# Altium PCB RdriveC1.PcbDoc (part 1 of 2)
Units mm, origin at the board's own origin, x right, y up, seen from the top; angles counter-clockwise.
Board outline 52.05 x 52.02 mm, 4 copper layers (Top Layer, S1, GND, Bottom Layer), stack 0.848 mm thick; 109 components, 86 nets, 393 pads, 206 vias.
Unrouted connection lines stored in the file: 2.
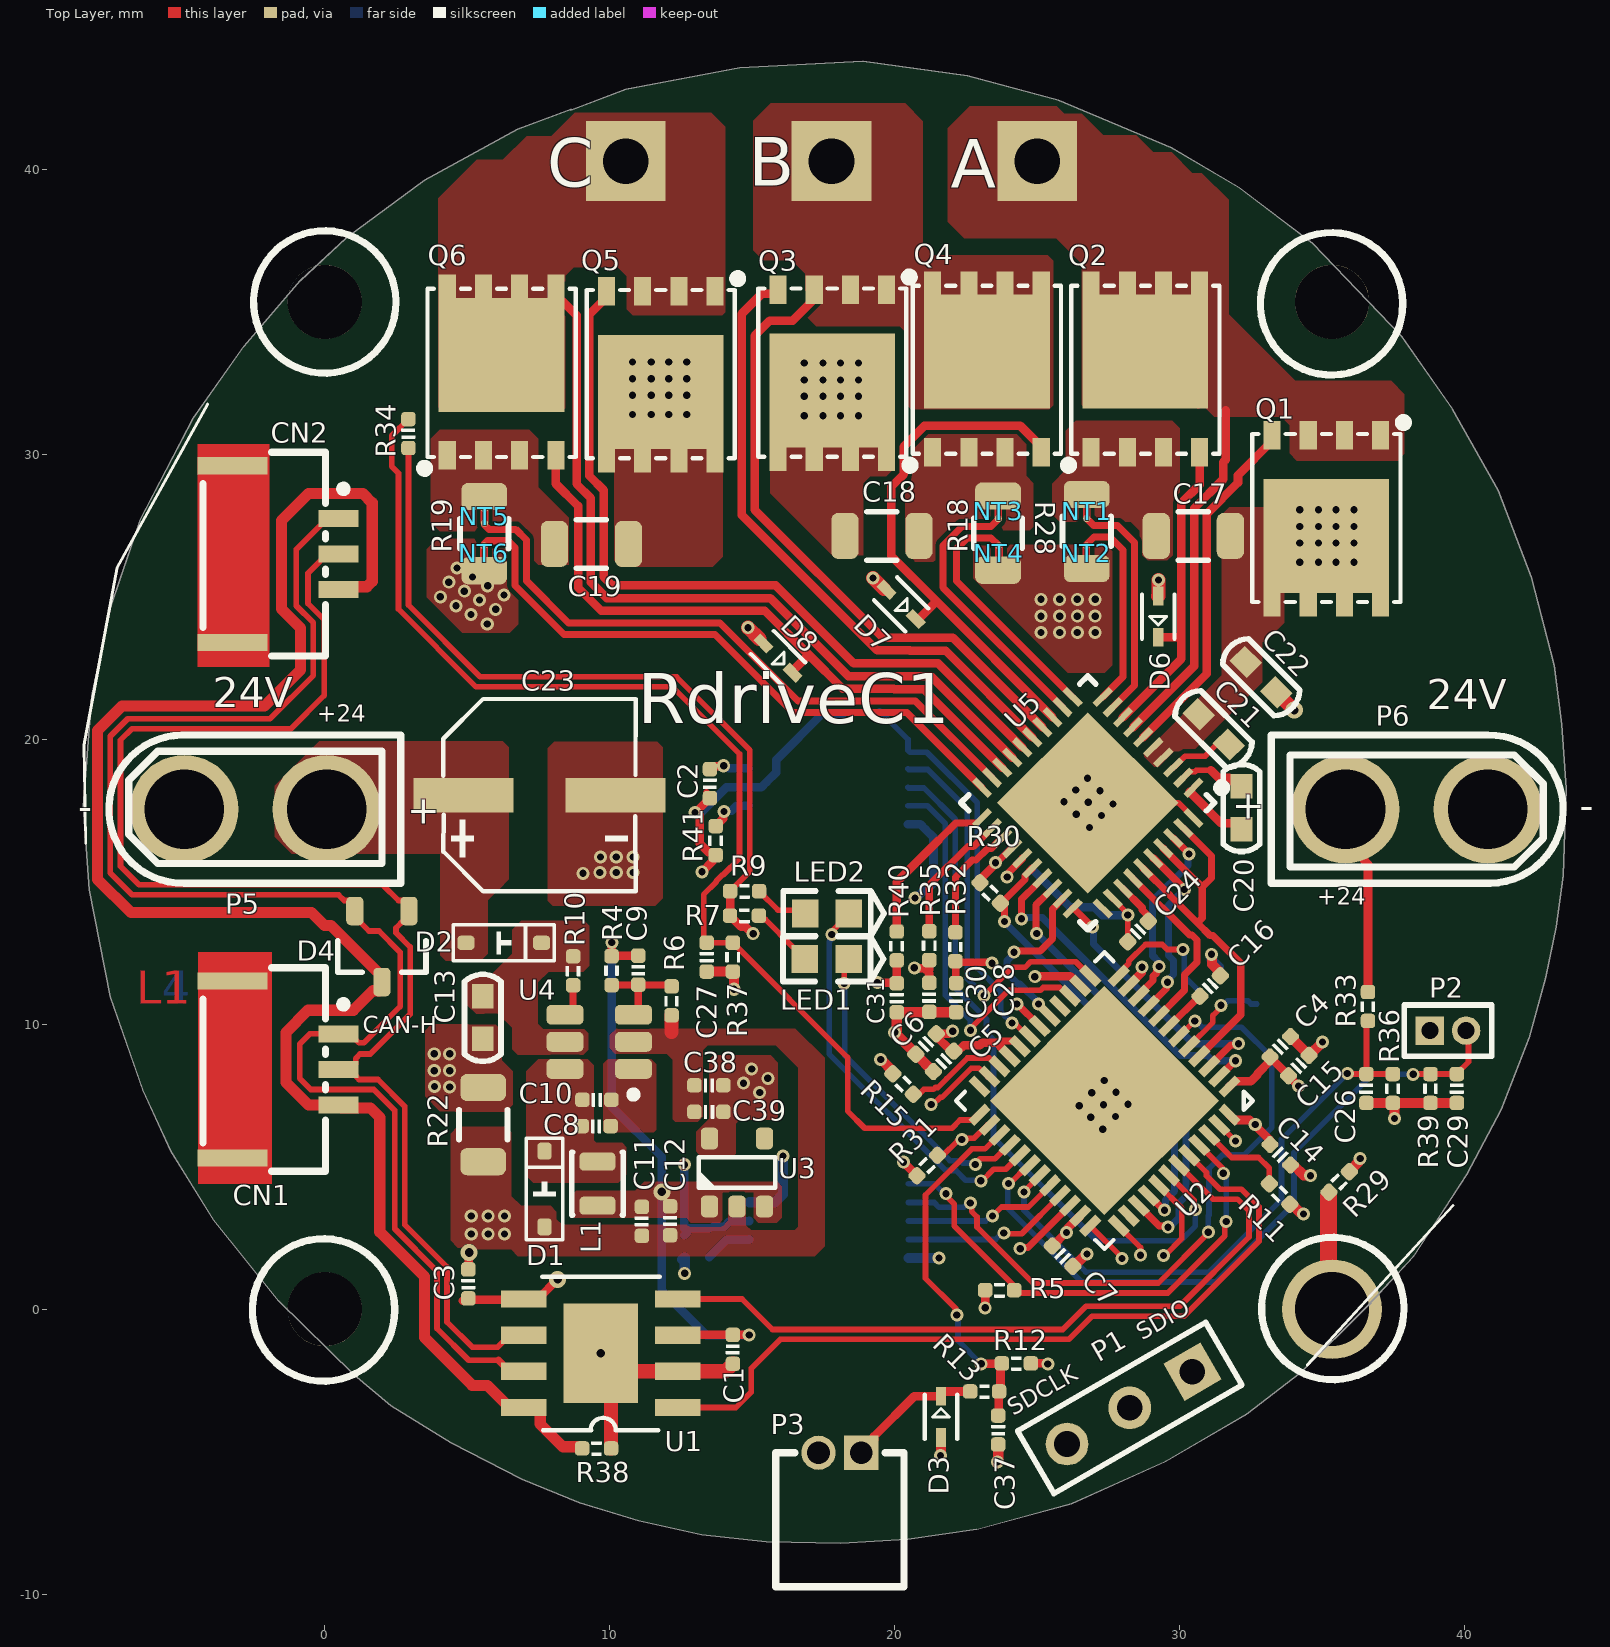
[diagram p0: Top Layer view]
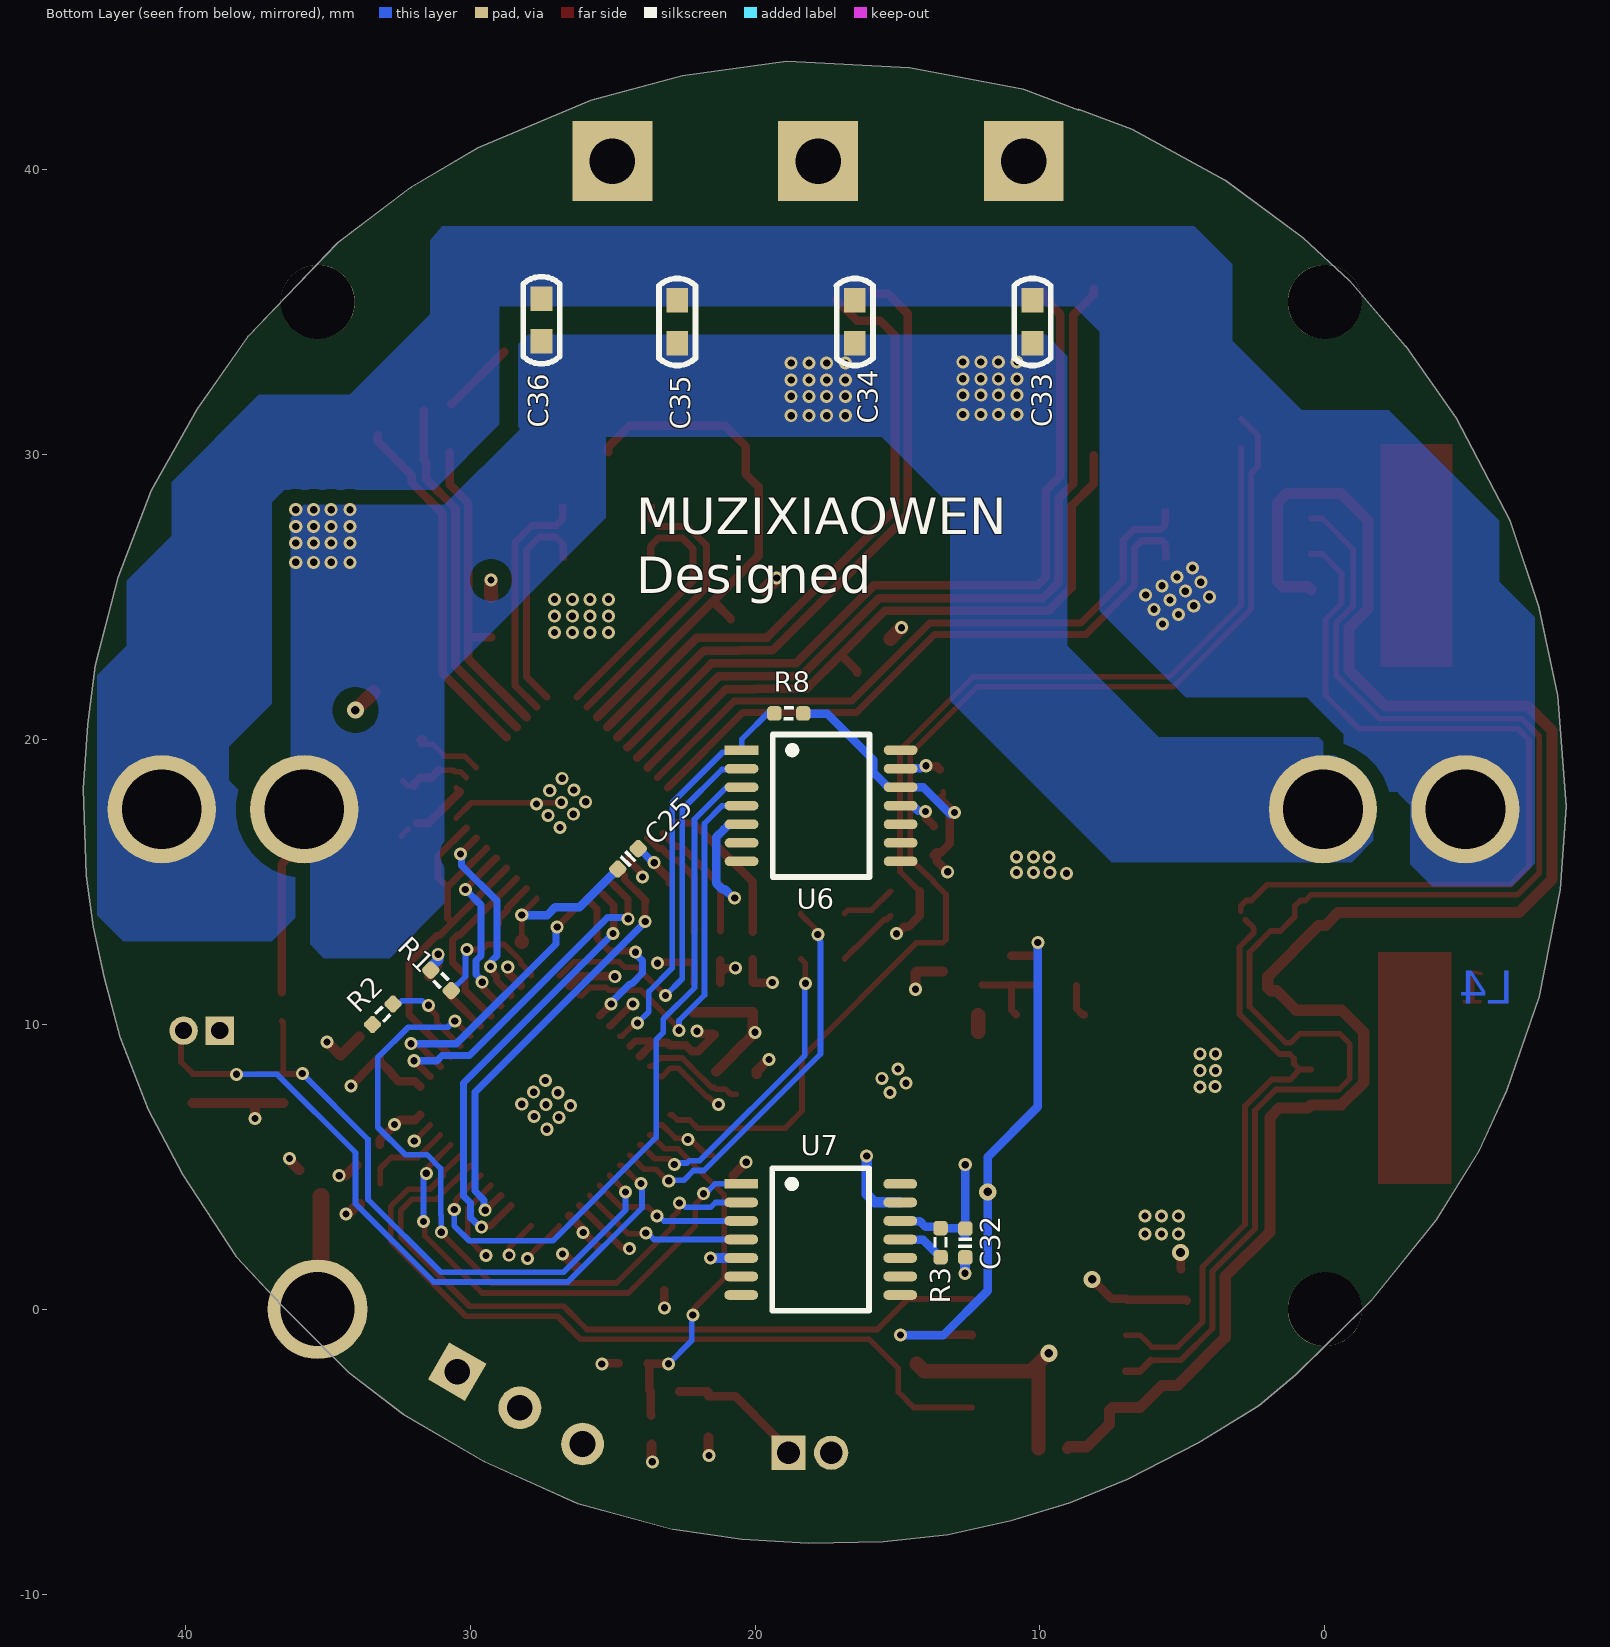
[diagram p1: Bottom Layer view, seen from below]
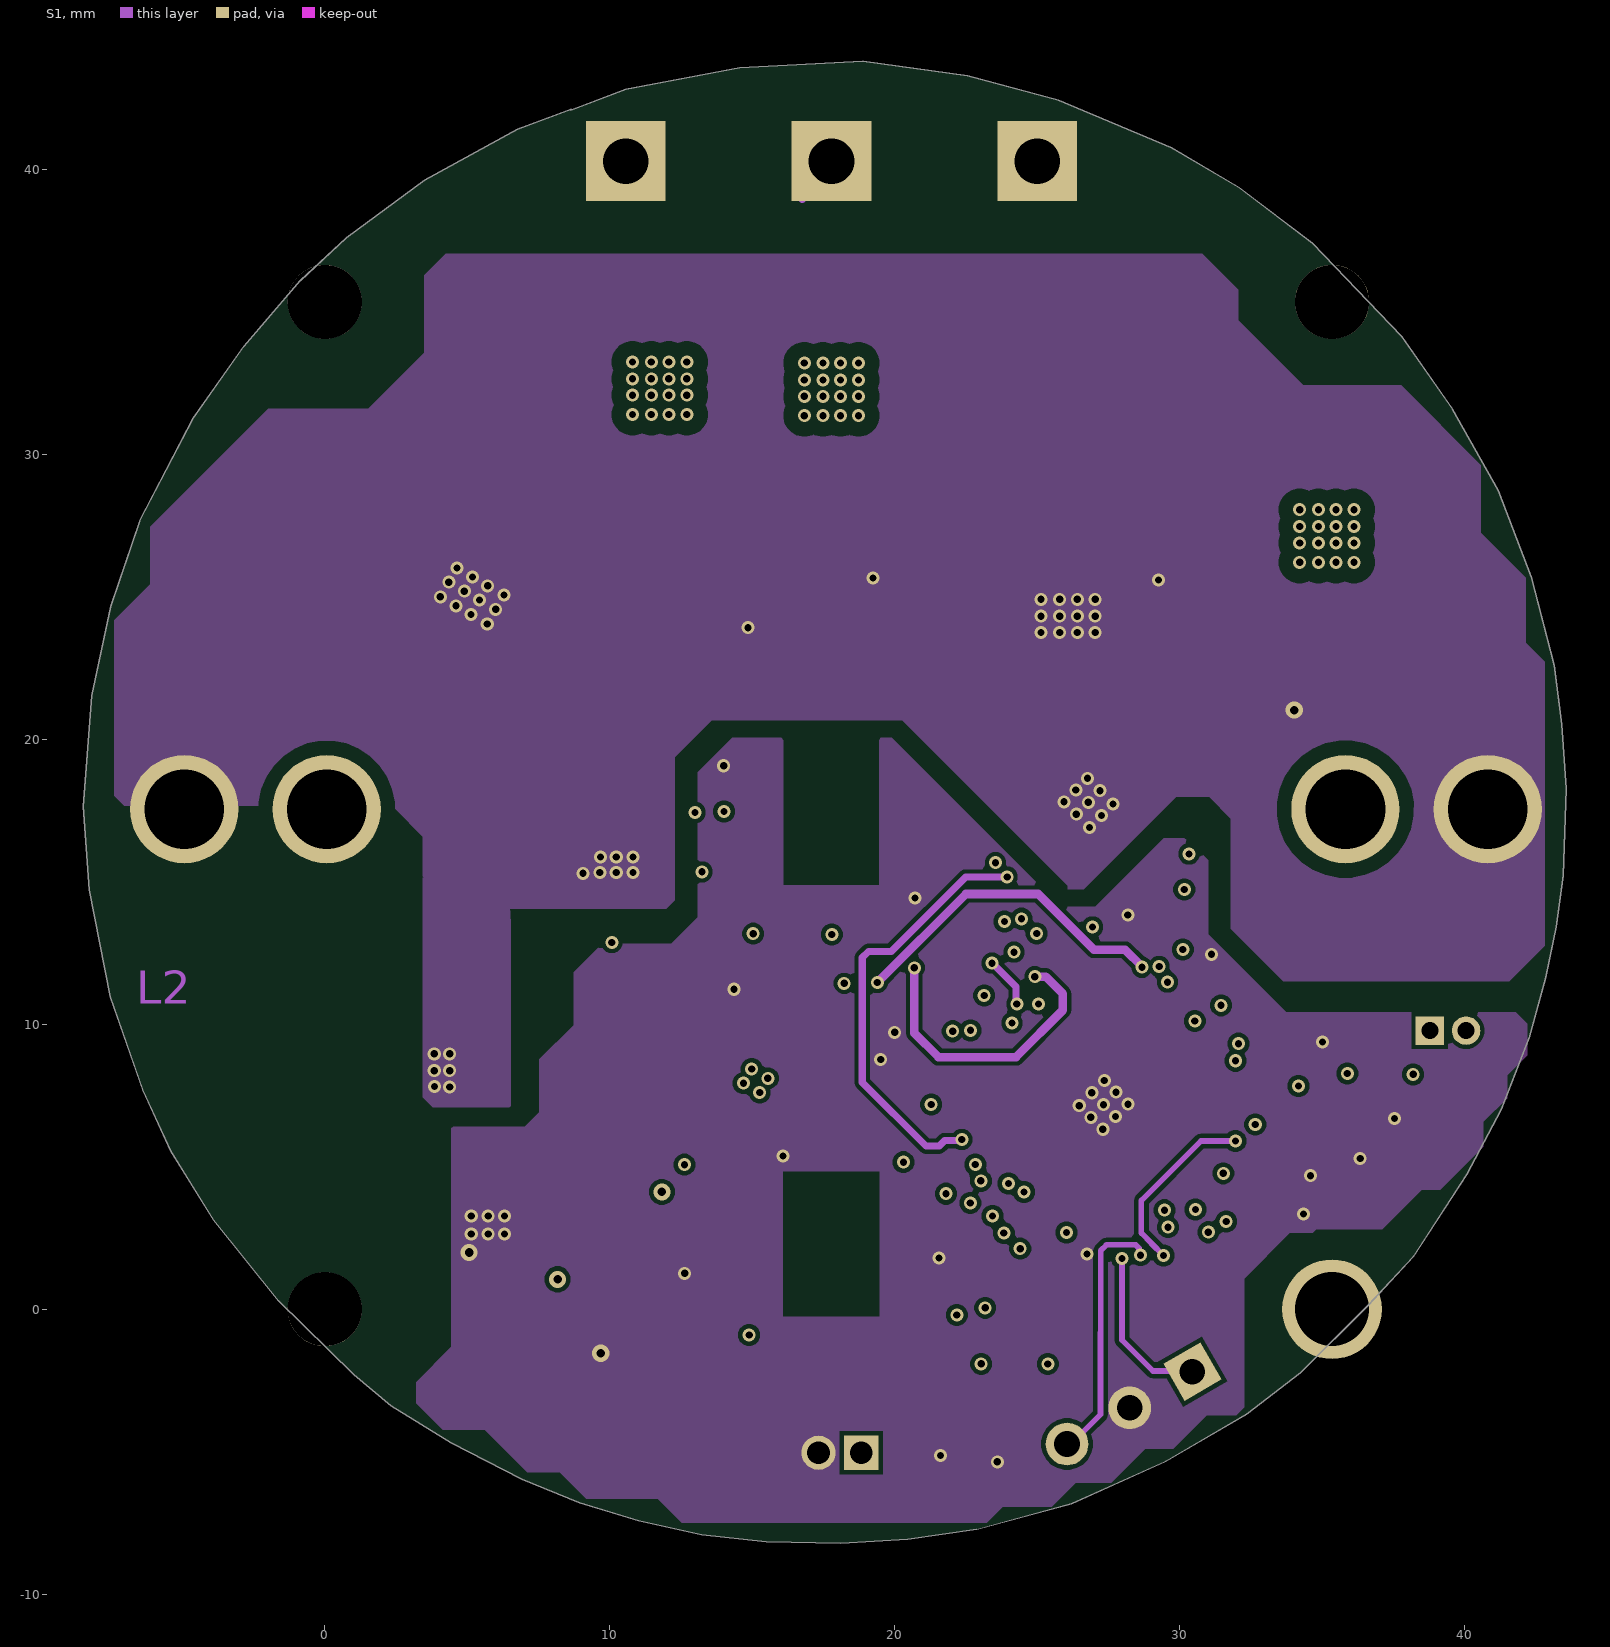
[diagram p2: S1]
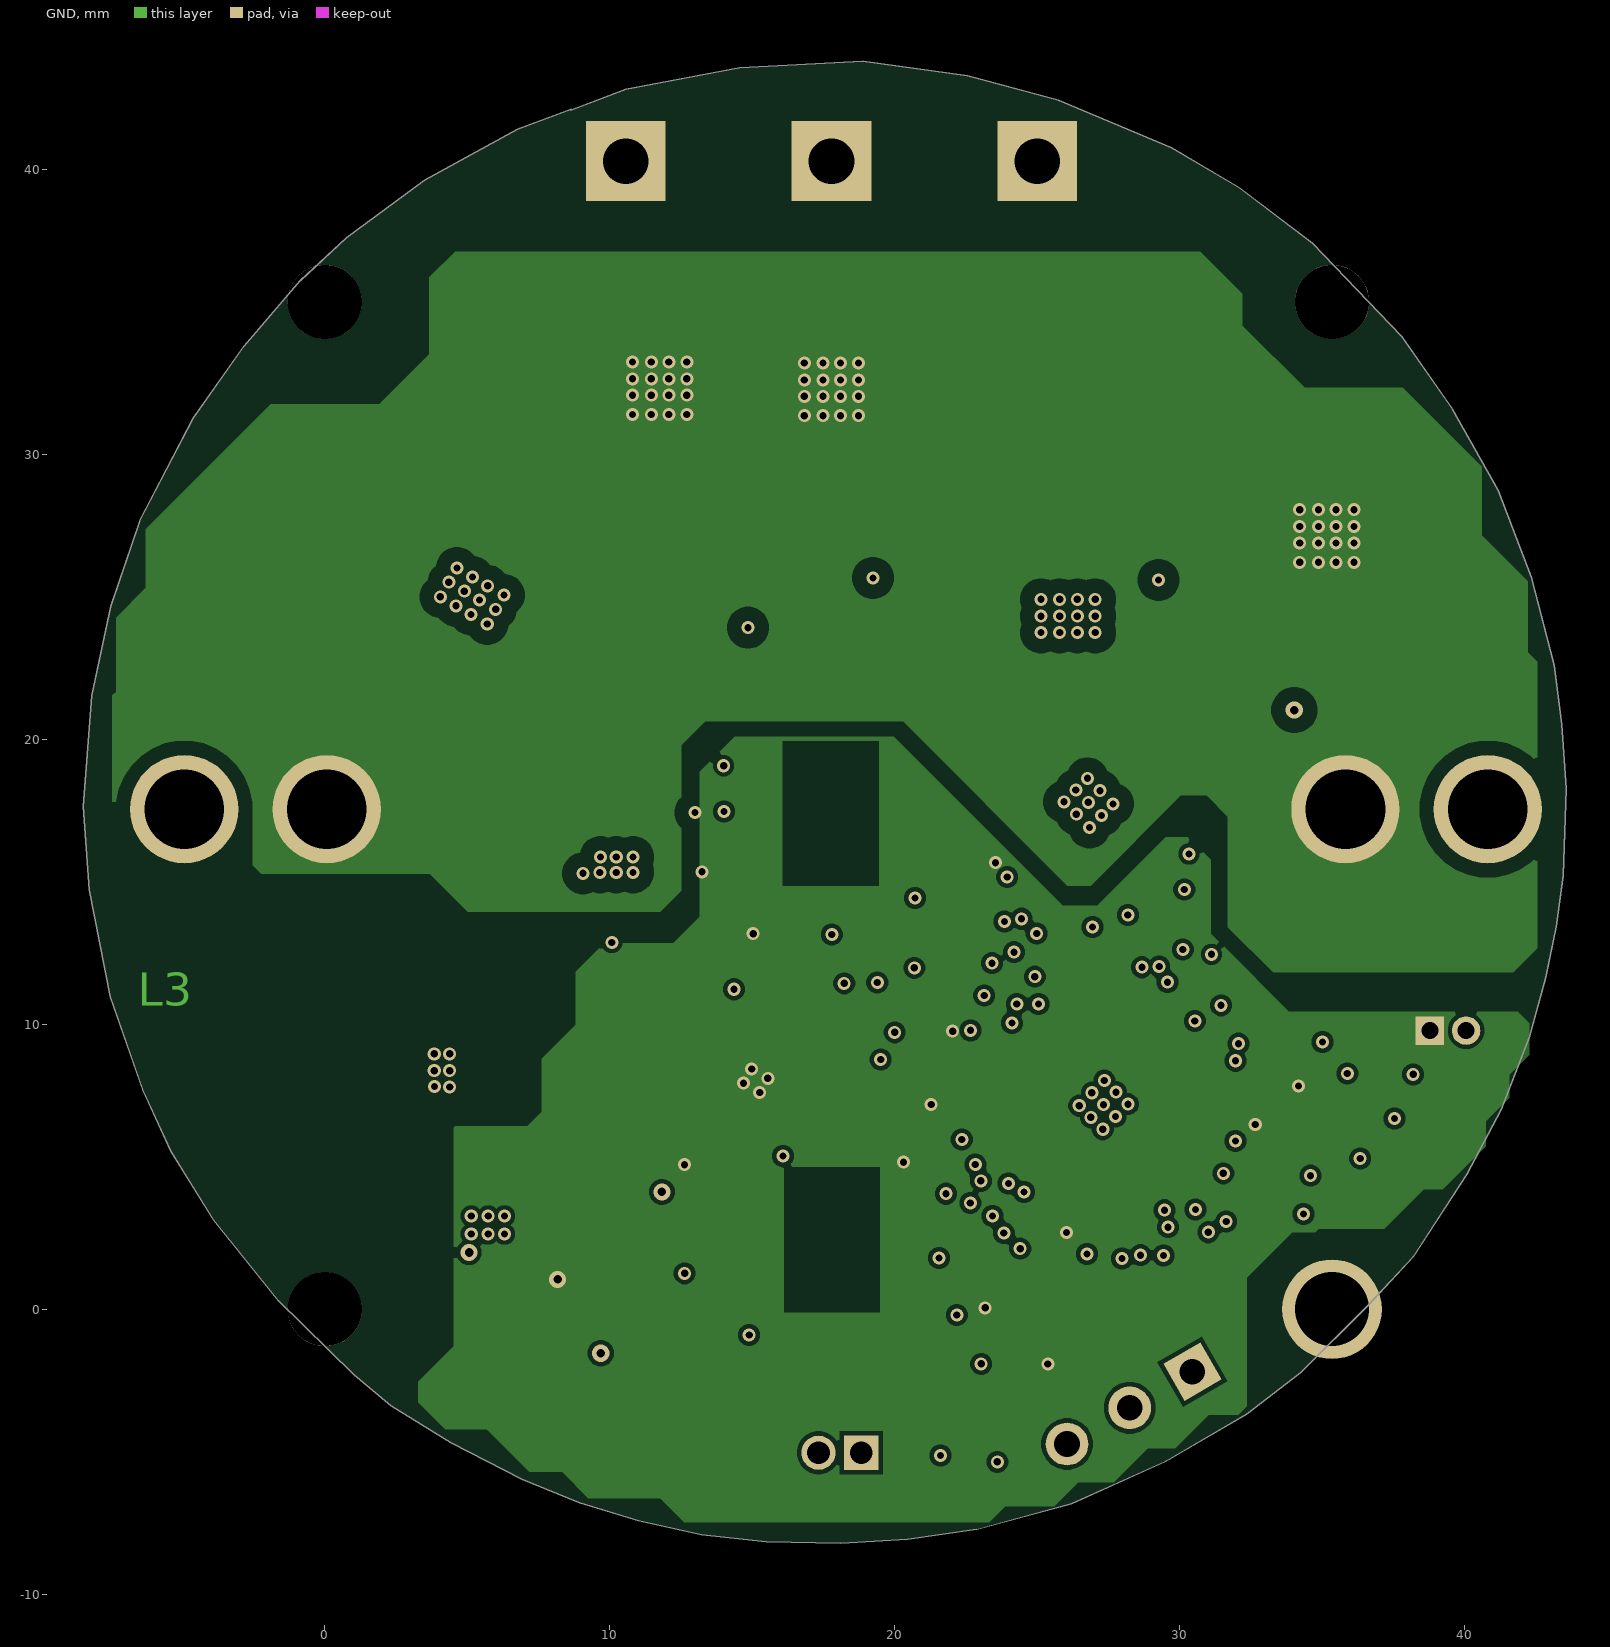
[diagram p3: GND]
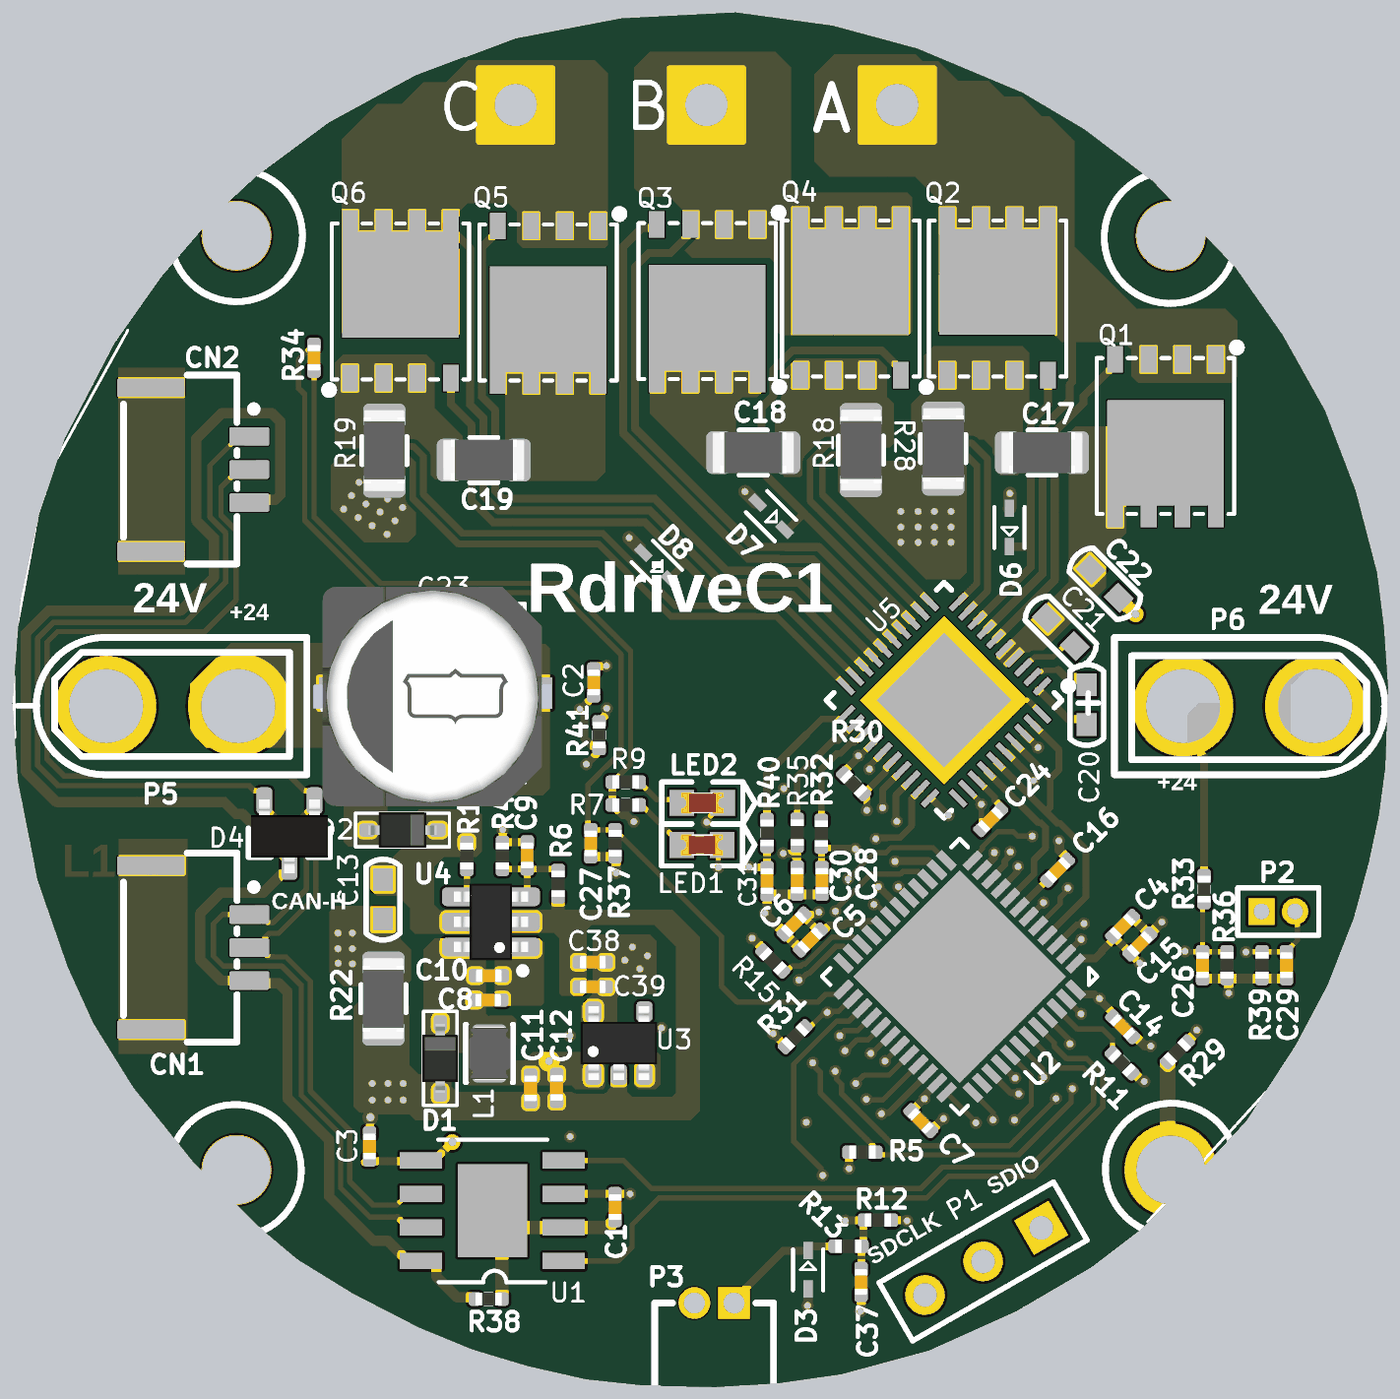
[diagram p5: 3D render of the assembled board from above, using the file's embedded part models]
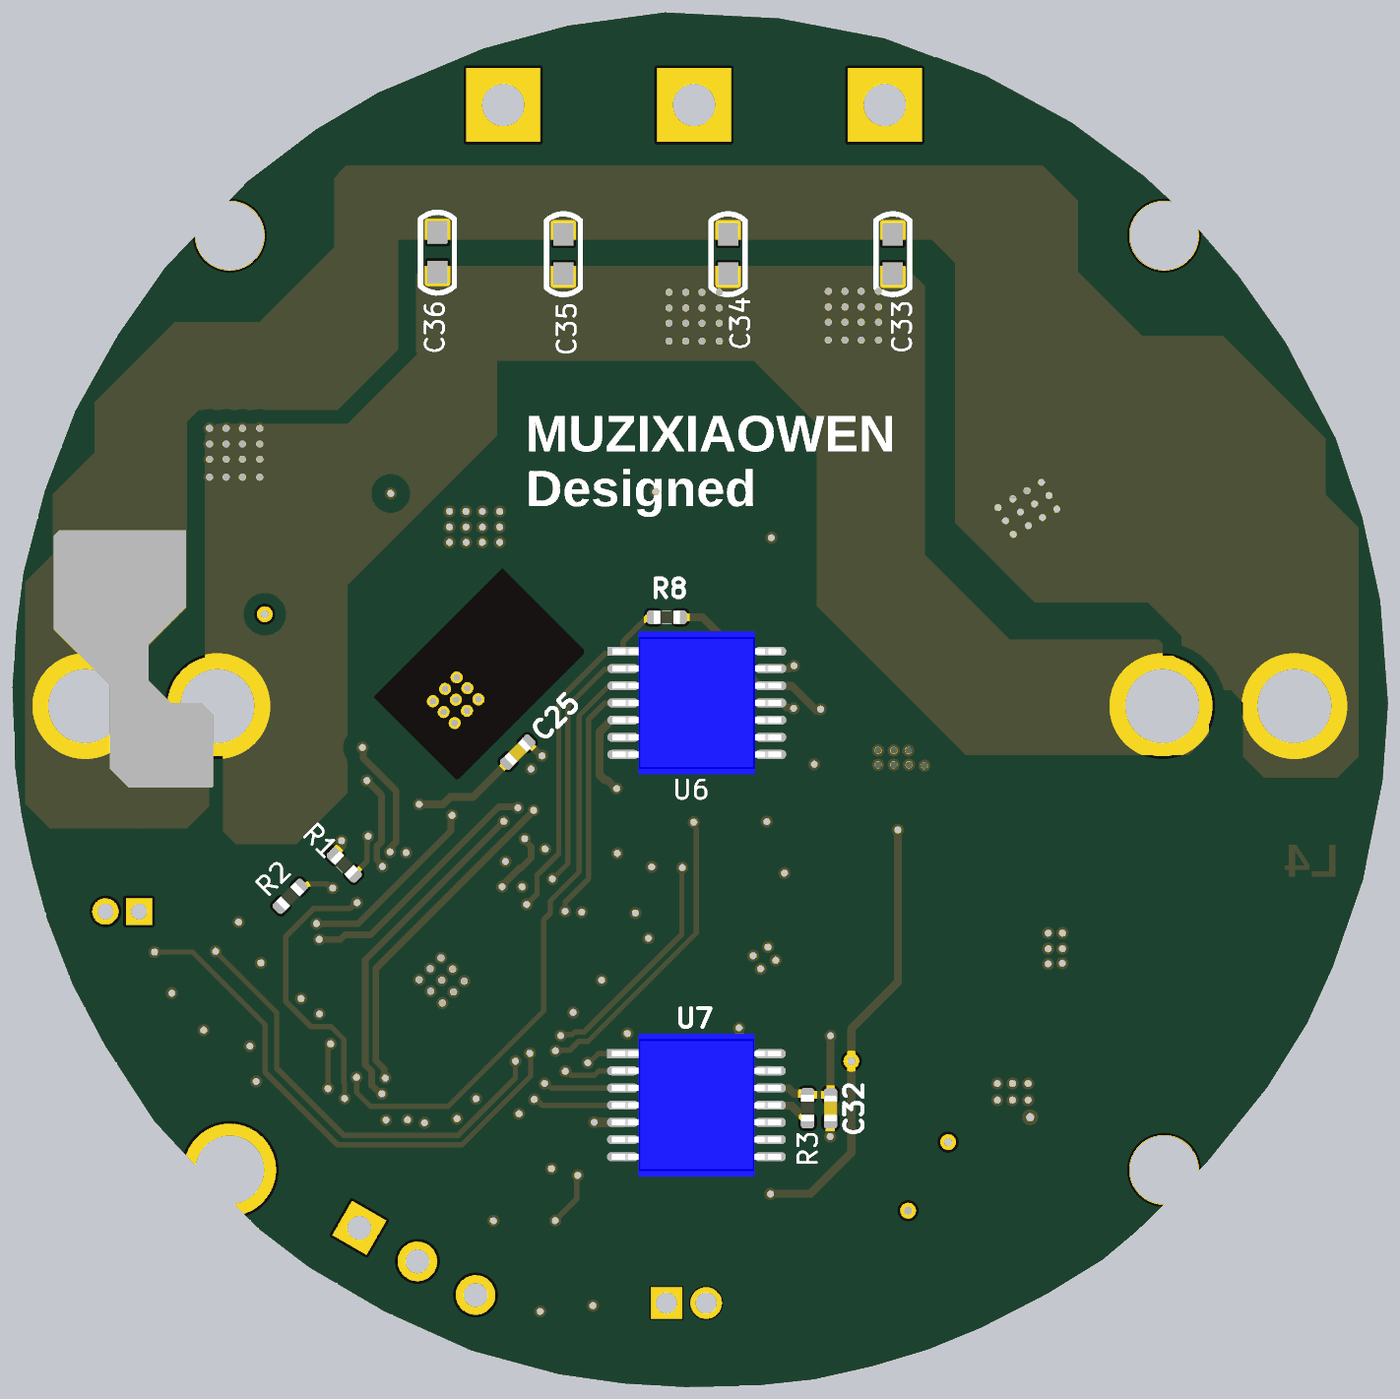
[diagram p6: 3D render of the assembled board from below, using the file's embedded part models]

## Layer stack, top to bottom
Top Solder: solder mask 0.0102, Solder Resist, Dk 3.5
Top Layer: signal copper 0.0356
Dielectric 1: core 0.254, FR-4, Dk 4.2
Dielectric 3: core 0.127, FR-4, Dk 4.2
S1: signal copper 0.036
Dielectric 4: prepreg 0.0711, PP-006, Dk 4.1
GND: signal copper 0.035
Dielectric 2: core 0.254, Dk 4.2
Bottom Layer: signal copper 0.0356
Bottom Solder: solder mask 0.0102, Solder Resist, Dk 3.5

## Board outline
8.635,42.088 10.572,42.814 14.568,43.575 18.893,43.8 22.56,43.298 25.76,42.434 29.722,40.773 32.092,39.372 34.669,37.417 37.8,34.148 39.582,31.605 41.19,28.733 42.349,25.706 43.163,22.592 43.422,20.534 43.578,18.268 43.474,15.223 43.232,13.424 42.851,11.642 42.28,9.532 41.294,7.006 40.083,4.723 38.215,1.851 36.606,0.122 34.254,-2.231 32.351,-3.684 29.514,-5.345 26.21,-6.832 22.889,-7.732 20.467,-8.078 18.114,-8.216 15.502,-8.164 13.236,-7.922 11.022,-7.42 8.946,-6.798 6.922,-5.967 4.431,-4.687 2.321,-3.39 1.024,-2.3 -1.623,0.295 -3.906,3.132 -5.411,5.553 -6.38,7.681 -7.522,10.968 -8.266,14.721 -8.473,17.645 -8.179,21.537 -7.504,24.668 -6.501,27.661 -4.616,31.276 -2.834,33.802 -0.862,36.102 0.764,37.607 3.497,39.631 6.767,41.413 8.652,42.122

## Design rules (kind name [scope] priority, off if disabled: settings)
Clearance Clearance_2 [InNet('DCBUS')] p1 off: gap=0.5 ignorepadtopadclearanceinfootprint=FALSE
Clearance Clearance_1 [All] p2: gap=0.15 ignorepadtopadclearanceinfootprint=FALSE
Clearance [InNet('PGND')] p3 off: gap=0.5 ignorepadtopadclearanceinfootprint=FALSE
ComponentClearance [All] p1 off: gap=0 collisioncheckmode=3 verticalgap=0.254 showdistances=FALSE
DiffPairsRouting [All] p1: maxlimit=0.254 minlimit=0.254 mostfreqgap=0.254 toplayer_minwidth=0.381 toplayer_maxwidth=0.381 toplayer_prefwidth=0.381 midlayer1_minwidth=0.381 midlayer1_maxwidth=0.381 midlayer1_prefwidth=0.381 midlayer2_minwidth=0.381 midlayer2_maxwidth=0.381 midlayer2_prefwidth=0.381 bottomlayer_minwidth=0.381 bottomlayer_maxwidth=0.381 bottomlayer_prefwidth=0.381 substack1={5B69FCFA-7DF9-414E-A3D1-88AEDCC3E603} toplayer_{5b69fcfa-7df9-414e-a3d1-88aedcc3e603}_minwidth=0.381 toplayer_{5b69fcfa-7df9-414e-a3d1-88aedcc3e603}_maxwidth=0.381 toplayer_{5b69fcfa-7df9-414e-a3d1-88aedcc3e603}_prefwidth=0.381 midlayer1_{5b69fcfa-7df9-414e-a3d1-88aedcc3e603}_minwidth=0.381 midlayer1_{5b69fcfa-7df9-414e-a3d1-88aedcc3e603}_maxwidth=0.381 midlayer1_{5b69fcfa-7df9-414e-a3d1-88aedcc3e603}_prefwidth=0.381 midlayer2_{5b69fcfa-7df9-414e-a3d1-88aedcc3e603}_minwidth=0.381 midlayer2_{5b69fcfa-7df9-414e-a3d1-88aedcc3e603}_maxwidth=0.381 midlayer2_{5b69fcfa-7df9-414e-a3d1-88aedcc3e603}_prefwidth=0.381 bottomlayer_{5b69fcfa-7df9-414e-a3d1-88aedcc3e603}_minwidth=0.381 bottomlayer_{5b69fcfa-7df9-414e-a3d1-88aedcc3e603}_maxwidth=0.381 bottomlayer_{5b69fcfa-7df9-414e-a3d1-88aedcc3e603}_prefwidth=0.381 maxuncoupledlength=12.7
HoleSize [All] p1: absolutevalues=TRUE maxlimit=9.54 minlimit=0.025 maxpercent=80.000 minpercent=20.000
HoleToHoleClearance [All] p1 off: gap=0.254 allowstackedmicrovias=TRUE
MinimumSolderMaskSliver [All] p1 off: minsoldermaskwidth=0.254
PasteMaskExpansion [All] p1 off: expansion=0
PlaneClearance [All] p1: clearance=0.3
PlaneConnect [All] p1: planeconnectstyle=Direct reliefexpansion=0.208 reliefentries=4 reliefconductorwidth=0.454 reliefairgap=0.254
PolygonConnect [All] p1: connectstyle=Direct reliefconductorwidth=0.454 reliefentries=4 polygonreliefangle="90 Angle" airgapwidth=0.254
RoomDefinition RdriveC1 [InComponentClass('RdriveC1')] p1 off: confinementstyle=ConfineIn formatcopy=TRUE lockcomponents=FALSE outline -127.016,-93.71 -76.216,-93.71 -76.216,-68.31 -127.016,-68.31
RoutingCorners [All] p1 off: cornerstyle=45-Degree minsetback=2.54 maxsetback=2.54
RoutingLayers [All] p1: top layer_v5=TRUE mid layer 1_v5=TRUE mid layer 2_v5=FALSE bottom layer_v5=TRUE
RoutingVias [All] p1: holewidth=2.711 width=0.6 viastyle="Through Hole" minholewidth=0.1 minwidth=0.3 maxholewidth=2.711 maxwidth=6.27
SilkToBoardRegionClearance [All] p1 off:
SilkToSilkClearance [All] p1 off: silktosilkclearance=0.254
SilkToSolderMaskClearance [IsPad] p1 off: minsilkscreentomaskgap=0.254 clearancetoexposedcopper=TRUE
SolderMaskExpansion [All] p1 off: expansion=0.102 istentingtop=FALSE
Width [All] p1: maxlimit=8.254 minlimit=0.1 preferedwidth=0.254 substack1={5B69FCFA-7DF9-414E-A3D1-88AEDCC3E603}
17 further rules are at their usual default settings.

## Components (designator, comment, footprint, x,y, rotation, side; value= is the part's Value field where it differs from the comment)
A "M" motor 25.007,40.243 r0 top
B "M" motor 17.788,40.243 r0 top
C "M" motor 10.568,40.243 r0 top
C1 "0.1uF" CAP_0402 14.327,-1.407 r270 top value=0.1u
C2 "0.1uF" CAP_0402 13.521,18.448 r90 top
C3 "0.1uF" CAP_0402 5.038,0.887 r90 top value=0.1u
C4 "10uF" CAP_0402 33.538,9.213 r225 top value=0.1u
C5 "0.1uF" CAP_0402 21.724,8.701 r225 top
C6 "1uF" CAP_0402 21.105,9.308 r225 top
C7 "0.1uF" CAP_0402 25.899,1.862 r135 top
C8 "0.1uF" CAP_0402 9.529,6.429 r0 top value=0.1u
C9 "100pF" CAP_0402 11.005,11.901 r270 top
C10 "0.1uF" CAP_0402 9.552,7.352 r0 top value=0.1u
C11 "0.1uF" CAP_0402 11.132,3.086 r90 top value=0.1u
C12 "10uF" CAP_0402 12.12,3.104 r90 top value=0.1u
C13 "10uF/35V" C0603 5.542,10.219 r270 top value="22uF 35V"
C14 "0.1uF" CAP_0402 33.539,5.421 r315 top
C15 "0.1uF" CAP_0402 34.188,8.552 r45 top
C16 "0.1uF" CAP_0402 31.078,11.347 r225 top value=0.1u
C17 "0.1uF/100V" 1206-RES 30.486,27.144 r180 top
C18 "0.1uF/100V" 1206-RES 19.558,27.144 r0 top
C19 "0.1uF/100V" 1206-RES 9.361,26.861 r180 top locked
C20 "47nF/100V" C0603 32.173,17.587 r270 top
C21 "1uF/25V" C0603 31.193,20.368 r135 top
C22 "0.1uF/100V" C0603 32.871,22.171 r315 top
C23 "220uF" 3d-CAP-SMD_BD6.3-L6.6-W6.6-LS7.2-FD 7.539,18.043 r0 top value=220uF/36V
C24 "1uF" CAP_0402 28.547,13.259 r45 top
C25 "1uF" CAP_0402 24.461,15.808 r135 bottom
C26 "1uF" CAP_0402 36.563,7.747 r270 top
C27 "1uF" CAP_0402 13.408,12.358 r270 top
C28 "1000PF" CAP_0402 22.16,10.937 r90 top
C29 "1uF" CAP_0402 39.736,7.747 r270 top
C30 "1000PF" CAP_0402 21.22,10.947 r90 top
C31 "1000PF" CAP_0402 20.081,10.929 r90 top
C32 "0.1uF" CAP_0402 12.621,2.325 r270 bottom
C33 "10uF/35V" C0603-3d 10.27,34.644 r270 bottom value="22uF 35V"
C34 "10uF/35V" C0603-3d 16.503,34.644 r270 bottom value="22uF 35V"
C35 "10uF/35V" C0603-3d 22.736,34.644 r270 bottom value="22uF 35V"
C36 "10uF/35V" C0603-3d 27.502,34.704 r270 bottom value="22uF 35V"
C37 "0.1uF" CAP_0402 23.638,-4.24 r270 top
C38 "0.1uF" CAP_0402 13.483,7.861 r0 top value=0.1u
C39 "10uF" CAP_0402 13.483,6.927 r0 top value=0.1u
CN1 "WAFER-GH1.25-3PLT-W1-P" CONN-SMD_WAFER-GH1.25-3PLT-W1-P -1.375,8.414 r270 top locked
CN2 "WAFER-GH1.25-3PLT-W1-P" CONN-SMD_WAFER-GH1.25-3PLT-W1-P -1.375,26.505 r270 top locked
D1 "二极管-5819W" SOD-323 7.713,4.22 r90 top
D2 "二极管-5819W" SOD-323 6.284,12.862 r0 top
D3 "moteus_BAT41KFILM" moteus:SOD-523_STM 21.635,-3.781 r90 top value=ESD5Z3.3
D4 "NUP2105" SOT23-3 2.005,12.73 r270 top
D6 "moteus_BAT41KFILM" moteus:SOD-523_STM 29.255,24.31 r270 top value=BAT41KFILM
D7 "moteus_BAT41KFILM" moteus:SOD-523_STM 20.233,24.739 r315 top value=BAT41KFILM
D8 "moteus_BAT41KFILM" moteus:SOD-523_STM 15.909,22.854 r315 top value=BAT41KFILM
L1 "6.8uH" IND-201612 9.573,4.408 r270 top
LED1 "LED RED" LC-0603_LED_S3 17.618,12.294 r180 top
LED2 "LED GREEN" LC-0603_LED_S3 17.631,13.889 r180 top
NT1 "0.25mm" NetTie_0.25mm 26.745,27.755 r90 top net-tie
NT2 "0.25mm" NetTie_0.25mm 26.734,26.793 r270 top net-tie
NT3 "0.25mm" NetTie_0.25mm 23.64,27.755 r90 top net-tie
NT4 "0.25mm" NetTie_0.25mm 23.664,26.793 r270 top net-tie
NT5 "0.25mm" NetTie_0.25mm 5.606,27.591 r90 top net-tie
NT6 "0.25mm" NetTie_0.25mm 5.588,26.793 r270 top net-tie
P1 "Header 3" HDR1X3 30.455,-2.193 r210 top
P2 "MHDR1X2" MHDR1X2 38.791,9.779 r0 top
P3 "MHDR1X2" CONN-TH_2P-P1.50_HCTL_HC-ZH1.5-2AW 18.079,-5.038 r0 top
P5 "HC-MX3.0-2*1AW" CONN-TH_XT30UW-F.G.Y -2.433,17.552 r0 top
P6 "HC-MX3.0-2*1AW" CONN-TH_XT30UW-F.G.Y 38.324,17.551 r180 top
Q1 "SE3082G2" DFN-8_L5.9-W5.2-P1.27-LS6.2-BL 35.157,27.746 r180 top
Q2 "SE3082G2" DFN-8_L5.9-W5.2-P1.27-LS6.2-BL 28.806,32.998 r0 top
Q3 "SE3082G2" DFN-8_L5.9-W5.2-P1.27-LS6.2-BL 17.815,32.852 r180 top
Q4 "SE3082G2" DFN-8_L5.9-W5.2-P1.27-LS6.2-BL 23.244,32.998 r0 top
Q5 "SE3082G2" DFN-8_L5.9-W5.2-P1.27-LS6.2-BL 11.795,32.798 r180 top
Q6 "SE3082G2" DFN-8_L5.9-W5.2-P1.27-LS6.2-BL 6.206,32.891 r0 top
R1 "100K" RES_0402 31.025,11.541 r45 bottom
R2 "0" RES_0402 33.068,10.354 r135 bottom
R3 "0" RES_0402 13.49,2.335 r270 bottom
R4 "5.1K" RES_0402 10.069,11.883 r270 top
R5 "10K" RES_0402 23.69,0.668 r0 top value=22R
R6 "1K" RES_0402 12.175,10.825 r270 top
R7 "560" RES_0402 14.733,13.813 r0 top value=22R
R8 "10K" RES_0402 18.818,20.912 r0 bottom value=22R
R9 "560" RES_0402 14.736,14.673 r0 top value=22R
R10 "1M" RES_0402 8.718,11.876 r90 top
R11 "DNI" RES_0402 33.515,4.045 r315 top
R12 "10K" RES_0402 24.277,-1.903 r180 top value=22R
R13 "560" RES_0402 23.162,-2.888 r180 top value=22R
R15 "2K" RES_0402 20.3,7.904 r135 top
R18 "1mOhm" 1206-RES 23.635,27.239 r90 top locked
R19 "1mOhm" 1206-RES 5.597,27.222 r90 top locked
R22 "0" 1206-RES 5.561,6.48 r270 top
R28 "1mOhm" 1206-RES 26.745,27.298 r90 top
R29 "0" RES_0402 35.606,4.468 r225 top
R30 "2K" RES_0402 23.356,14.61 r135 top
R31 "2K" RES_0402 21.145,5.042 r225 top
R32 "22R" RES_0402 22.136,12.722 r90 top value=2.2R
R33 "100K" RES_0402 36.618,10.626 r90 top
R34 "47K" CAP_0402 2.936,30.736 r270 top
R35 "22R" RES_0402 21.22,12.761 r90 top value=2.2R
R36 "4.7k" RES_0402 37.489,7.747 r90 top
R37 "10K" RES_0402 14.323,12.358 r270 top
R38 "0" RES_0402 9.543,-4.888 r180 top
R39 "10K" RES_0402 38.812,7.747 r270 top
R40 "22R" RES_0402 20.078,12.75 r90 top value=2.2R
R41 "0" RES_0402 13.725,16.449 r90 top
U1 "TCAN1057AVDRBRQ1" SOIC8_2 9.679,-1.547 r180 top
U2 "moteus_STM32G474CEU6" moteus:UFQFPN-48_7X7X0P55MM 27.367,7.319 r45 top locked value=STM32G474CEU6
U3 "ME6211 3V3" SOT23-5-3d 14.471,4.799 r90 top
U4 "ME3116" SOT23-6 9.634,9.386 r180 top
U5 "DRV8323SRTAR" WQFN-40_L6.0-W6.0-P0.50-TL-EP4.5 26.78,17.775 r225 top locked
U6 "AS5047P" TSSOP14_2 17.682,17.672 r180 bottom locked
U7 "AS5047P" TSSOP14_2 17.696,2.449 r180 bottom locked

## Footprints (in the part's own frame and the unit in brackets; to place one, negate y for a bottom-side part, rotate by r counter-clockwise, add the part's x,y. Pads: shape width x height; smd on the part's side, far side on the other; paste and mask are expansions set on the pad)
3d-CAP-SMD_BD6.3-L6.6-W6.6-LS7.2-FD [mm]
  rect 3.5x1.2 smd: 1(-2.67,0) 2(2.67,0)
  silkscreen extent -3.38,-3.38 3.38,3.38, body extent -4.63,-4.28 4.37,4.02, height 6
1206-RES [mm]
  rrect50% 0.956x1.61 smd paste+0 mask+0: 1(-1.301,0) 2(1.301,0)
  silkscreen extent -0.52,-0.85 0.52,0.85, body extent -1.55,-0.78 1.55,0.78, height 0.65
C0603 [mm]
  rect 0.86x0.76 smd: 1(-0.768,0.005) 2(0.732,0.005)
  silkscreen extent -1.53,-0.64 1.52,0.65
C0603-3d [mm]
  rect 0.86x0.76 smd: 1(-0.768,0.005) 2(0.732,0.005)
  silkscreen extent -1.53,-0.64 1.52,0.65, body extent -1.5,-0.75 1.5,0.75, height 1.5
CAP_0402 [mil]
  rrect50% 20x20 smd: 1(-20,0) 2(20,0)
  silkscreen extent -7,-9 6,9, body extent -20,-10 20,10, height 20
CONN-SMD_WAFER-GH1.25-3PLT-W1-P [mm]
  rect 0.6x1.4 smd paste+0.051: 1(-1.25,1.862) 2(0,1.862) 3(1.25,1.862)
  rect 0.6x2.45 smd paste+0.051: 4(3.1,-1.862) 5(-3.1,-1.862)
  silkscreen extent -3.58,-2.9 3.58,2.16
CONN-TH_2P-P1.50_HCTL_HC-ZH1.5-2AW [mm]
  rect 1.2x1.2 hole 0.8 paste+0 mask+0.05: 1(0.75,0)
  round 1.2 hole 0.8 paste+0 mask+0.05: 2(-0.75,0)
  silkscreen extent -2.25,-4.7 2.25,0
CONN-TH_XT30UW-F.G.Y [mm]
  round 3.8 hole 2.8: 1(-2.5,0) 2(2.5,0)
  silkscreen extent -5.14,-2.6 5.1,2.6
DFN-8_L5.9-W5.2-P1.27-LS6.2-BL [mm]
  rect 0.6x1 smd paste-100 mask+0.05: 1(-1.905,-2.925) 2(-0.635,-2.925) 3(0.635,-2.925) 4(1.905,-2.925) 5(-1.905,2.925) 5(-0.635,2.925) 5(0.635,2.925) 5(1.905,2.925)
  rect 4.41x4 smd paste-100 mask+0.05: 5(0,0.61)
  silkscreen extent -2.85,-3.53 2.6,2.92
HDR1X3 [mm] "Connector; Header; 3 Position"
  rect 1.5x1.5 hole 0.9: 1(0,0)
  round 1.5 hole 0.9: 2(2.54,0) 3(5.08,0)
  silkscreen extent -1.27,-1.27 6.35,1.27
IND-201612 [mm]
  rrect50% 0.635x1.27 smd paste+0 mask+0: 1(-0.774,0) 2(0.774,0)
  silkscreen extent -1.1,-0.9 1.1,0.9, body extent -1,-0.8 1,0.8, height 0.95
LC-0603_LED_S3 [mm]
  rect 0.93x0.98 smd: A(0.77,0) C(-0.77,0)
  silkscreen extent -2,-0.79 1.53,0.79, body extent -0.8,-0.4 0.8,0.4, height 0.6
MHDR1X2 [mm] "Connector; Header; 2 Position"
  rect 1x1 hole 0.6: 1(0,0)
  round 1 hole 0.6: 2(1.27,0)
  silkscreen extent -0.9,-0.9 2.17,0.9
moteus:SOD-523_STM [mil]
  rect 26x14 smd paste+0 mask+0: 1(28.5,0) 2(-28.5,0)
  silkscreen extent -30,-23 30,23
moteus:UFQFPN-48_7X7X0P55MM [mil]
  rect 32x12 smd paste+0 mask+0: 1(136,-108.27) 2(136,-88.58) 3(136,-68.9) 4(136,-49.21) 5(136,-29.53) 6(136,-9.84) 7(136,9.84) 8(136,29.53) 9(136,49.21) 10(136,68.9) 11(136,88.58) 12(136,108.27) 25(-136,108.27) 26(-136,88.58) 27(-136,68.9) 28(-136,49.21) 29(-136,29.53) 30(-136,9.84) 31(-136,-9.84) 32(-136,-29.53) 33(-136,-49.21) 34(-136,-68.9) 35(-136,-88.58) 36(-136,-108.27)
  rect 12x32 smd paste+0 mask+0: 13(108.27,136) 14(88.58,136) 15(68.9,136) 16(49.21,136) 17(29.53,136) 18(9.84,136) 19(-9.84,136) 20(-29.53,136) 21(-49.21,136) 22(-68.9,136) 23(-88.58,136) 24(-108.27,136) 37(-108.27,-136) 38(-88.58,-136) 39(-68.9,-136) 40(-49.21,-136) 41(-29.53,-136) 42(-9.84,-136) 43(9.84,-136) 44(29.53,-136) 45(49.21,-136) 46(68.9,-136) 47(88.58,-136) 48(108.27,-136)
  rect 224x224 smd paste+0 mask+0: 49(0,0)
  silkscreen extent -145,-145 145,145
motor [mm]
  rect 2.8x2.8 hole 1.6: 1(0,0.056)
NetTie_0.25mm [mm] "Net tie, 0.25mm"
  round 0.25 smd paste-2 mask+0.102: 1(0,0) 2(0.5,0)
  Top Layer region: 0,0.125 0.5,0.125 0.5,-0.125 0,-0.125
RES_0402 [mil]
  rrect50% 20x20 smd: 1(-20,0) 2(20,0)
  silkscreen extent -6,-10 7,10, body extent -20,-10 20,10, height 14
SOD-323 [mm]
  rrect50% 0.6x0.5 smd: 1(-1.329,0) 2(1.329,0)
  silkscreen extent -1.78,-0.64 1.78,0.64, body extent -1.3,-0.68 1.3,0.67, height 1.15
SOIC8_2 [mil] "SOIC8_1P27_4X5"
  rect 63x24 smd: 1(-106.62,74.92) 2(-106.62,24.92) 3(-106.62,-25.08) 4(-106.62,-75.08) 5(105.98,-75.08) 6(105.98,-25.08) 7(105.98,24.92) 8(105.98,74.92)
  rect 103x138 smd: 9(-0.32,-0.08)
  silkscreen extent -82,-106 80,107
SOT23-3 [mm] "SOT23, 3-Leads, Body 3.1x3.0mm (max), Pitch 0.95mm, IPC Medium Density"
  rrect50% 1x0.6 smd: 1(-1.246,0.95) 2(-1.246,-0.95) 3(1.246,0)
  silkscreen extent -0.2,-1.55 0.9,1.55, body extent -1.3,-1.45 1.5,1.45, height 1.2
SOT23-5-3d [mil]
  rrect50% 30x24 smd: 1(-47,38) 2(-47,0) 3(-47,-38) 4(47,-38) 5(47,38)
  silkscreen extent -21,-53 21,53, body extent -55,-57 55,57, height 57
SOT23-6 [mm]
  rrect50% 1.3x0.7 smd: 1(-1.2,0.95) 2(-1.2,0) 3(-1.2,-0.95) 4(1.2,-0.95) 5(1.2,0) 6(1.2,0.95)
  silkscreen extent -1.33,1.73 -1.08,1.97, body extent -1.4,-1.45 1.4,1.45, height 1.45
TSSOP14_2 [mm]
  rect 1.188x0.341 smd paste+0 mask+0: 1(-2.791,1.95)
  oval 1.188x0.341 smd paste+0 mask+0: 2(-2.791,1.3) 3(-2.791,0.65) 4(-2.791,0) 5(-2.791,-0.65) 6(-2.791,-1.3) 7(-2.791,-1.95) 8(2.791,-1.95) 9(2.791,-1.3) 10(2.791,-0.65) 11(2.791,0) 12(2.791,0.65) 13(2.791,1.3) 14(2.791,1.95)
  silkscreen extent -1.7,-2.5 1.7,2.5, body extent -3.2,-2.7 3.2,2.7, height 1.1
WQFN-40_L6.0-W6.0-P0.50-TL-EP4.5 [mm]
  rect 0.8x0.22 smd paste-100 mask+0.051: 1(-3,2.25) 2(-3,1.75) 3(-3,1.25) 4(-3,0.75) 5(-3,0.25) 6(-3,-0.25) 7(-3,-0.75) 8(-3,-1.25) 9(-3,-1.75) 10(-3,-2.25) 21(3,-2.25) 22(3,-1.75) 23(3,-1.25) 24(3,-0.75) 25(3,-0.25) 26(3,0.25) 27(3,0.75) 28(3,1.25) 29(3,1.75) 30(3,2.25)
  rect 0.22x0.8 smd paste-100 mask+0.051: 11(-2.25,-3) 12(-1.75,-3) 13(-1.25,-3) 14(-0.75,-3) 15(-0.25,-3) 16(0.25,-3) 17(0.75,-3) 18(1.25,-3) 19(1.75,-3) 20(2.25,-3) 31(2.25,3) 32(1.75,3) 33(1.25,3) 34(0.75,3) 35(0.25,3) 36(-0.25,3) 37(-0.75,3) 38(-1.25,3) 39(-1.75,3) 40(-2.25,3)
  rect 4.5x4.5 smd paste-100 mask+0.051: 41(0,0)
  silkscreen extent -3.85,-3.15 3.15,3.15

## Part data
C1 C3 C4 C8 C9 C10 C11 C12 C13 C16 C17 C18 C19 C20 C21 C22 C24 C25 C28 C30 C31 C33 C34 C35 C36 C38 C39: library part 电容-0402, "Capacitor"
C2 C5 C7 C14 C15 C32 C37: library part GRM188R71H104KA93D, "CAP CER 0.1UF 50V X7R 0603", Manufacturer="Murata Electronics North America", Operating Temperature="-55°C ~ 125°C", Package / Case="0603 (1608 Metric)", Ratings=-, Supplier Part Number 1=490-1519-2-ND, Temperature Coefficient=X7R, Tolerance=±10%, Voltage - Rated=50V, Applications="General Purpose", Capacitance=0.1uF, Category=Capacitors, ComponentLink1Description=http://www.murata.com/~/media/webrenewal/support/library/catalog/products/capacitor/mlcc/c02e.ashx?la=en-us, ComponentLink1URL=http://www.murata.com/~/media/webrenewal/support/library/catalog/products/capacitor/mlcc/c02e.ashx?la=en-us, Features=-, Height - Seated (Max)=-, Lead Spacing=-, Lead Style=-, Manufacturer Part Number=GRM188R71H104KA93D, Mounting Type="Surface Mount, MLCC", Packaging="Tape & Reel (TR)", Part Status=Active, Pricing 1="4000=0.01822, 8000=0.01663, 12000=0.01584 (USD)", Pricing 2="1=0.12, 10=0.084, 100=0.0396, 500=0.02778, 1000=0.023 (USD)", RoHS="RoHS Compliant", Size / Dimension="0.063\" L x 0.032\" W (1.60mm x 0.80mm)", Stock=19812000, Supplier 1=Digi-Key, Supplier 2=Digi-Key, Supplier Part Number 2=490-1519-1-ND, Thickness (Max)="0.035\" (0.90mm)"
C6 C26 C27 C29: library part GRM188R71H104KA93D, "CAP CER 1UF 50V X7R 0603", Manufacturer="Murata Electronics North America", Operating Temperature="-55°C ~ 125°C", Package / Case="0603 (1608 Metric)", Ratings=-, Supplier Part Number 1=490-1519-2-ND, Temperature Coefficient=X7R, Tolerance=±10%, Voltage - Rated=50V, Applications="General Purpose", Capacitance=1uF, Category=Capacitors, ComponentLink1Description=http://www.murata.com/~/media/webrenewal/support/library/catalog/products/capacitor/mlcc/c02e.ashx?la=en-us, ComponentLink1URL=http://www.murata.com/~/media/webrenewal/support/library/catalog/products/capacitor/mlcc/c02e.ashx?la=en-us, Features=-, Height - Seated (Max)=-, Lead Spacing=-, Lead Style=-, Manufacturer Part Number=GRM188R71H104KA93D, Mounting Type="Surface Mount, MLCC", Packaging="Tape & Reel (TR)", Part Status=Active, Pricing 1="4000=0.01822, 8000=0.01663, 12000=0.01584 (USD)", Pricing 2="1=0.12, 10=0.084, 100=0.0396, 500=0.02778, 1000=0.023 (USD)", RoHS="RoHS Compliant", Size / Dimension="0.063\" L x 0.032\" W (1.60mm x 0.80mm)", Stock=19812000, Supplier 1=Digi-Key, Supplier 2=Digi-Key, Supplier Part Number 2=490-1519-1-ND, Thickness (Max)="0.035\" (0.90mm)"
C23: library part EEEFP1E471AP, "CAP, FP Series, 470 µF, 25 V, Radial Can - SMD, 10 mm", ESR (Equivalent Series Resistance)="60 mOhm @ 100kHz", Lifetime @ Temp.="2000 Hrs @ 105°C", Manufacturer="Panasonic Electronic Components", Manufacturer Part Number=EEE-FP1E471AP, Operating Temperature="-55°C ~ 105°C", Package / Case="Radial, Can - SMD", Ripple Current - High Frequency="1.19A @ 100kHz", Ripple Current - Low Frequency="773.5mA @ 120Hz", Supplier Part Number 1=PCE4440TR-ND, Tolerance=±20%, Applications=Automotive, Category=Capacitors, ComponentLink1Description=http://industrial.panasonic.com/www-cgi/jvcr13pz.cgi?E+PZ+3+ABA0114+EEEFP1E471AP+7+WW, ComponentLink1URL=http://industrial.panasonic.com/www-cgi/jvcr13pz.cgi?E+PZ+3+ABA0114+EEEFP1E471AP+7+WW, Height - Seated (Max)="0.402\" (10.20mm)", Lead Spacing=-, Mounting Type="Surface Mount", Packaging="Tape & Reel (TR)", Part Status=Active, Polarization=Polar, Pricing 1="500=0.3571, 1000=0.30072, 2500=0.28192, 5000=0.26313, 12500=0.24997, 25000=0.24434 (USD)", Pricing 2="1=0.92, 10=0.702, 100=0.5025 (USD)", RoHS="RoHS Compliant", Size / Dimension="0.394\" Dia (10.00mm)", Stock=8000, Supplier 1=Digi-Key, Supplier 2=Digi-Key, Supplier Part Number 2=PCE4440CT-ND, Surface Mount Land Size="0.406\" L x 0.406\" W (10.30mm x 10.30mm)"
D1 D2: "40V"
D3 D6 D7 D8: MPN=BAT41KFILM, AddInBom=yes, Device=moteus_BAT41KFILM, FootprintName=moteus:SOD-523_STM, ki_fp_filters="SOD-523_STM SOD-523_STM-M SOD-523_STM-L", ki_keywords=BAT41KFILM, MF=ST, POPULATE=1, Symbol=moteus_BAT41KFILM, UniqueId=e417e3fc4267d002, UserDocLink=BAT41KFILM
L1: library part 电感-201612
LED1 LED2: library part LED, "LED GRN SGL RA 25mA 4.1V SMD", AGILE_PN=370-76642, CAD_APPROVED=Yes, CLASS=IC, HEIGHT=4.25MM, MFG_NAME01=Kingbright, MFG_PN01=AA4040ZGS, PN=19-217/G7C-AN1P2/3T, RoHS=Yes
NT1 NT2 NT3 NT4 NT5 NT6: library part NetTie_0.25mm
P1: "Header, 3-Pin", LatestRevisionDate=17-Jul-2002, LatestRevisionNote="Re-released for DXP Platform.", Publisher="Altium Limited"
P2 P3: "Header, 2-Pin", LatestRevisionDate=17-Jul-2002, LatestRevisionNote="Re-released for DXP Platform.", Publisher="Altium Limited"
Q1 Q2 Q3 Q4 Q5 Q6: "MOSFET N-CH 30V 13A SO8FL", Current - Continuous Drain (Id) @ 25°C="13A (Ta), 93A (Tc)", Drain to Source Voltage (Vdss)=30V, Drive Voltage (Max Rds On,  Min Rds On)="4.5V, 10V", Input Capacitance (Ciss) (Max) @ Vds="4850pF @ 15V", Manufacturer="ON Semiconductor", Manufacturer Part Number=NTMFS4935NT1G, Operating Temperature="-55°C ~ 150°C (TJ)", Package / Case="8-PowerTDFN, 5 Leads", Power Dissipation (Max)="930mW (Ta), 48W (Tc)", Supplier Device Package="5-DFN (5x6) (8-SOFL)", Supplier Part Number 1=NTMFS4935NT1GOSCT-ND, Category="Discrete Semiconductor Products", ComponentLink1Description=http://www.onsemi.com/pub_link/Collateral/NTMFS4935N-D.PDF, ComponentLink1URL=http://www.onsemi.com/pub_link/Collateral/NTMFS4935N-D.PDF, FET Feature=-, FET Type=N-Channel, Gate Charge (Qg) (Max) @ Vgs="49.4nC @ 10V", Mounting Type="Surface Mount", Packaging="Cut Tape (CT)", Part Status=Active, Pricing 1="1=0.61, 10=0.541, 100=0.4145, 500=0.3277 (USD)", Rds On (Max) @ Id, Vgs="3.2 mOhm @ 30A, 10V", RoHS="RoHS Compliant", Stock 1=932, Supplier 1=Digi-Key, Technology="MOSFET (Metal Oxide)", Vgs (Max)=±20V, Vgs(th) (Max) @ Id="2.2V @ 250µA"
R1 R4 R5 R6 R7 R8 R9 R10 R11 R12 R13 R15 R30 R31 R32 R35 R38 R40: library part 电阻-0402, "Resistor"
R2 R3 R22 R29 R33 R36 R41: library part RC0603FR-071KL, "RES SMD 1K OHM 1% 1/10W 0603", Manufacturer=Yageo, Operating Temperature="-55°C ~ 155°C", Package / Case="0603 (1608 Metric)", Power (Watts)="0.1W, 1/10W", Resistance (Ohms)=1k, Supplier Device Package=0603, Supplier Part Number 1=311-1.00KHRCT-ND, Temperature Coefficient=±100ppm/°C, Tolerance=±1%, Category=Resistors, ComponentLink1Description=http://www.yageo.com/documents/recent/PYu-RC_Group_51_RoHS_L_04.pdf, ComponentLink1URL=http://www.yageo.com/documents/recent/PYu-RC_Group_51_RoHS_L_04.pdf, Composition="Thick Film", Features="Moisture Resistant", HEIGHT="0.022\" (0.55mm)", Manufacturer Part Number=RC0603FR-071KL, Number of Terminations=2, Packaging="Cut Tape (CT)", Pricing 1="1=0.1, 10=0.014, 25=0.01, 100=0.0057, 250=0.00436, 500=0.00348, 1000=0.00257, 2500=0.00223 (USD)", RoHS="RoHS Compliant", Size / Dimension="0.063\" L x 0.031\" W (1.60mm x 0.80mm)", Stock 1=6734836, Supplier 1=Digi-Key
R18 R19 R28: library part CSR2512C0R0005F, "RES SMD 0.0005 OHM 1% 3W 2512", Manufacturer=Riedon, Operating Temperature="-55°C ~ 170°C", Package / Case="2512 (6432 Metric)", Power (Watts)=3W, Supplier Device Package=2512, Supplier Part Number 1=696-1183-2-ND, Temperature Coefficient=±100ppm/°C, Tolerance=±1%, Category=Resistors, ComponentLink1Description=http://riedon.com/media/pdf/CSR.pdf, ComponentLink1URL=http://riedon.com/media/pdf/CSR.pdf, Composition="Metal Element", Failure Rate=-, Features="Current Sense", Height - Seated (Max)="0.057\" (1.45mm)", Manufacturer Part Number=CSR2512C0R0005F, Packaging="Tape & Reel (TR)", Part Status=Active, Pricing 1="2000=0.19817, 6000=0.1937, 10000=0.187, 50000=0.18148 (USD)", Pricing 2="1=0.69, 10=0.574, 25=0.4916, 50=0.4426, 100=0.3852, 250=0.3442, 500=0.27864, 1000=0.22536 (USD)", RoHS="RoHS Compliant", Size / Dimension="0.250\" L x 0.118\" W (6.35mm x 3.00mm)", Stock=2000, Supplier 1=Digi-Key, Supplier 2=Digi-Key, Supplier Part Number 2=696-1183-1-ND
R34: library part NCP15XH103F03RC, "THERMISTOR 10K OHM NTC 0402 SMD"
R37 R39: library part RC0603FR-073K3L, "RES SMD 3.3K OHM 1% 1/10W 0603", Manufacturer=Yageo, Operating Temperature="-55°C ~ 155°C", Package / Case="0603 (1608 Metric)", Power (Watts)="0.1W, 1/10W", Resistance (Ohms)=3.3k, Supplier Device Package=0603, Supplier Part Number 1=311-3.30KHRCT-ND, Temperature Coefficient=±100ppm/°C, Tolerance=±1%, Category=Resistors, ComponentLink1Description=http://www.yageo.com/documents/recent/PYu-RC_Group_51_RoHS_L_04.pdf, ComponentLink1URL=http://www.yageo.com/documents/recent/PYu-RC_Group_51_RoHS_L_04.pdf, Composition="Thick Film", Features="Moisture Resistant", HEIGHT="0.022\" (0.55mm)", Manufacturer Part Number=RC0603FR-073K3L, Number of Terminations=2, Packaging="Cut Tape (CT)", Pricing 1="1=0.1, 10=0.014, 25=0.01, 100=0.0057, 250=0.00436, 500=0.00348, 1000=0.00257, 2500=0.00223 (USD)", RoHS="RoHS Compliant", Size / Dimension="0.063\" L x 0.031\" W (1.60mm x 0.80mm)", Stock 1=420019, Supplier 1=Digi-Key
U1: library part SIT1042ATK/3, JLCPCB Part Class="Extended Part", LCSC Part Name="SIT1042A CAN FD待机模式总线收发器", Manufacturer=SIT(芯力特), Operating Temperature=-40℃~+150℃, Supply Current=-, Supply Voltage=4.5V~5.5V, Add into BOM=yes, Convert to PCB=yes, Data Rate=5Mbps, Datasheet=https://atta.szlcsc.com/upload/public/pdf/source/20240906/0721301B0EA65A9C8E3ABE7B44C999B5.pdf, Device=SIT1042ATK/3, Manufacturer Part=SIT1042ATK/3, Supplier=LCSC, Supplier Footprint=DFN-8(3x3), Supplier Part=C5382546, Symbol=SIT1042ATK/3, Type=CAN-FD收发器
U2: MPN=STM32G474CEU6, AddInBom=yes, Device=moteus_STM32G474CEU6, FootprintName=moteus:UFQFPN-48_7X7X0P55MM, ki_fp_filters="UFQFPN-48_7X7X0P55MM UFQFPN-48_7X7X0P55MM-M UFQFPN-48_7X7X0P55MM-L", ki_keywords=STM32G474CEU6, MF=ST, POPULATE=1, Symbol=moteus_STM32G474CEU6, UniqueId=eac3f191c372887e, UserDocLink=STM32G474CEU6
U3: library part LP2992, "LDO"
U4: "DC-DC"
CN1 CN2: Symbol=WAFER-GH1.25-3PLT-W1-P
P5 P6: Symbol=HC-MX3.0-2*1AW
U5: Symbol=DRV8323SRTAR
U6 U7: Add into BOM=yes, Convert to PCB=yes, Device=AS5047P, Name=AS5047P, Origin Footprint=TSSOP-14, Symbol=AS5047P

## Free pads (board coordinates)
  round 2.6 hole 2.6: 1(0,0) 1(0,35.355) 1(35.355,35.355)
  round 3.5 hole 2.6: 1(35.355,0)

## Via types
v1: diameter 0.457, hole 0.254, Top Layer to Bottom Layer, tented both sides, 201 vias
v2: diameter 0.6, hole 0.3, Top Layer to Bottom Layer, 4 vias
v3: diameter 0.6, hole 0.3, Top Layer to Bottom Layer, tented both sides, 1 vias

## Nets (pads, with @x,y where several pads share a name; then routed paths per layer and width w, separated by ;. In a path a pad name is that pad's centre, name@x,y a point inside that pad or via, vN(x,y) a via of type N, cw(c..) or ccw(c..) an arc to the next point about the centre after c; other vN are vias at no path point)
AS5047_CS_1: R8.2 U2.19 U6.1 | length 14
  Top Layer w0.2: v1(24.123,10.047) 24.172,9.998 24.26,9.998 24.673,9.585 U2.19@24.748,9.585
  Bottom Layer w0.2: R8.2@19.469,21.007 20.473,20.003 U6.1@20.473,19.622 20.543,19.552 21.132,19.552 22.907,17.777 22.907,11.976 23.728,11.154 23.728,10.442 v1(24.123,10.047)
AUX1_A_1: U2.13 U6.2 | length 13.9
  Top Layer w0.2: v1(23.146,11.011) 24.133,11.998 24.574,11.998 24.772,12.196 26.359,12.196 26.849,11.706 U2.13@26.869,11.706
  Bottom Layer w0.2: U6.2@20.473,18.972 20.5,18.945 21.163,18.945 22.557,17.551 22.557,11.601 v1(23.146,11.011)
AUX1_B_1: U2.42 U6.3 | length 24.8
  Top Layer w0.2: U2.42@29.633,4.7 30.51,3.823 30.51,3.552 v1(30.559,3.503)
  Bottom Layer w0.2: U6.3@20.473,18.322 20.5,18.295 21.029,18.295 22.128,17.196 22.128,11.279 23.226,10.182 23.226,9.707 23.473,9.46 23.473,6.027 27.098,2.402 30.035,2.402 30.559,2.926 v1(30.559,3.503)
AUX1_C_1: U2.15 U6.4 | length 13.5
  Top Layer w0.2: v1(22.667,9.788) 22.667,9.855 24.005,11.193 25.123,11.193 25.22,11.291 25.796,11.291 26.088,10.999 U2.15@26.162,10.999
  Bottom Layer w0.2: U6.4@20.473,17.672 20.475,17.67 21.159,17.67 21.778,17.051 21.778,11.024 22.667,10.135 v1(22.667,9.788)
AUX1_D_1: U2.38
AUX1_E_1: U2.41 U2.47 | length 10.3
  Top Layer w0.2: U2.41@29.279,4.346 30.081,3.545 30.081,2.476 29.491,1.886 v1(29.444,1.886) ; U2.47@31.401,6.468 v1(31.963,5.905)
  S1 w0.2: v1(29.444,1.886) 29.012,2.318 29.012,2.325 28.664,2.673 28.664,3.814 30.755,5.905 v1(31.963,5.905)
AUX1_I2C_PULLUP_1: R11.1 U2.46 | length 3.1
  Top Layer w0.2: U2.46@31.047,6.114 31.838,5.323 32.778,5.323 33.156,4.946 R11.1@33.156,4.404
AUX2_A_SCLK_1: U2.6 U7.2 | length 24.4
  Top Layer w0.2: v1(22.659,3.732) 22.706,3.685 22.706,3.432 22.897,3.241 22.897,2.883 24.863,0.918 29.26,0.918 31.012,2.67 v1(31.012,2.702) ; U2.6@29.986,9.585 29.999,9.585 30.528,10.114 v1(30.541,10.114)
  Bottom Layer w0.2: U7.2@20.488,3.749 21.391,3.749 21.565,3.575 22.432,3.575 22.589,3.732 v1(22.659,3.732) ; v1(30.541,10.114) 30.571,10.114 30.786,9.899 32.176,9.899 33.243,8.831 33.243,6.388 32.282,5.426 31.521,5.426 31.038,4.943 31.038,3.305 31.012,3.279 v1(31.012,2.702)
AUX2_B_1: R2.1
AUX2_B_MISO_1: U2.32 U7.3 | length 5.5
  Top Layer w0.2: v1(23.439,3.27) 23.758,3.589 24.698,3.589 U2.32@25.455,4.346
  Bottom Layer w0.2: U7.3@20.488,3.099 23.198,3.099 23.369,3.27 v1(23.439,3.27)
AUX2_C_MOSI_1: U2.33 U7.4 | length 6
  Top Layer w0.2: v1(23.836,2.671) 23.857,2.649 24.465,2.649 U2.33@25.808,3.993
  Bottom Layer w0.2: U7.4@20.488,2.449 23.545,2.449 23.767,2.671 v1(23.836,2.671)
AUX2_D_CS_1: R5.2 U2.45 U7.1 | length 17.6
  Top Layer w0.2: v1(21.808,4.053) 21.808,3.984 22.096,3.696 22.096,2.918 24.272,0.742 24.447,0.568 29.587,0.568 31.591,2.572 31.591,3.028 v1(31.64,3.078) ; U2.45@30.693,5.761 31.492,4.962 31.492,4.819 v1(31.541,4.769)
  Bottom Layer w0.2: U7.1@20.488,4.399 21.406,4.399 21.752,4.053 v1(21.808,4.053) ; v1(31.541,4.769) 31.541,4.7 31.64,4.601 v1(31.64,3.078)
AUX2_I2C_PULLUP_1: U2.34 | length 2.4
  Top Layer w0.25: v1(24.412,2.124) 24.451,2.164 24.686,2.164 U2.34@26.162,3.639
CAN_GND: CN1.3 CN2.3 D4.3 R38.2 U1.8 | length 63.7
  Top Layer w0.39: CN2.3@0.487,25.255 0.592,25.36 1.479,25.36 1.666,25.546 1.666,28.307 1.338,28.634 -0.568,28.634 -1.518,27.684 -1.518,24.58 -0.845,23.908 -0.845,22.432 -2.11,21.168 -7.111,21.168 -7.971,20.307 -7.971,15.088 -6.807,13.924 -0.469,13.924 -0.016,13.47 0.219,13.47 2.005,11.684 D4.3@2.005,11.484 2.005,11.284 1.9,11.179 1.7,11.179 1.014,10.494 -0.586,10.494 -1.366,9.714 -1.366,7.957 -0.574,7.164 CN1.3@0.487,7.164 0.592,7.059 1.608,7.059 1.932,6.735 1.932,2.716 3.498,1.15 3.498,-0.995 5.178,-2.675 5.718,-2.675 6.492,-3.45 U1.8@6.987,-3.45 7.454,-3.45 7.564,-3.559 7.564,-4.026 8.367,-4.829 8.976,-4.829 R38.2@9.035,-4.888
CAN_H_1: CN1.1 CN2.1 D4.2 U1.7 | length 54.1
  Top Layer w0.2: CN2.1@0.487,27.755 0.087,27.755 -0.997,26.671 -0.997,24.689 -0.4,24.092 -0.4,22.248 -1.925,20.723 -6.914,20.723 -7.526,20.11 -7.526,15.314 -6.754,14.543 0.488,14.543 0.685,14.345 0.858,14.345 1.055,14.149 D4.2@1.055,13.976 1.055,13.776 1.556,13.275 1.906,13.275 1.906,13.27 2.647,12.529 2.647,10.624 1.37,9.348 1.204,9.348 0.887,9.664 -0.526,9.664 -0.878,9.312 -0.878,8.098 -0.494,7.714 1.291,7.714 1.294,7.71 1.723,7.71 2.454,6.979 2.454,2.823 3.943,1.334 3.943,-0.674 5.057,-1.789 6.101,-1.789
  Top Layer w0.25: 6.101,-1.789 6.492,-2.18 U1.7@6.987,-2.18
CAN_L_1: CN1.2 CN2.2 D4.1 U1.6 | length 50
  Top Layer w0.2: CN1.2@0.487,8.414 CN1.2@0.7,8.414 ; CN2.2@0.487,26.505 0.087,26.505 -0.585,25.833 -0.585,24.772 -0.021,24.207 -0.021,21.542 -1.19,20.373 -6.769,20.373 -7.167,19.974 -7.167,15.547 -6.519,14.898 2.032,14.898 2.585,14.345 2.758,14.345 2.955,14.149 D4.1@2.955,13.976 ; CN1.2@0.954,8.348 1.087,8.214 1.087,8.181 1.204,8.064 1.436,8.064 1.439,8.06 1.867,8.06 2.804,7.124 2.804,2.968 4.293,1.479 4.293,-0.45 5.174,-1.332 6.07,-1.332 6.492,-0.91 U1.6@6.987,-0.91 ; D4.1@2.792,13.673 2.499,13.38 2.499,13.214 2.997,12.717 2.997,10.353 1.598,8.955 1.241,8.955 1.087,8.801 1.087,8.614 CN1.2@0.887,8.414 ; CN1.2@0.7,8.414 CN1.2@0.887,8.414 ; CN1.2@0.7,8.414 CN1.2@0.887,8.414
CAN_RX_1: U1.4 U2.43 | length 25.9
  Top Layer w0.2: U1.4@12.387,0.36 14.644,0.36 15.714,-0.709 25.904,-0.709 26.717,0.104 30.014,0.104 32.442,2.532 32.442,3.455 32.034,3.863 31.177,3.863 U2.43@29.986,5.053
CAN_TX_1: U1.1 U2.44 | length 27.8
  Top Layer w0.2: U1.1@12.387,-3.45 14.431,-3.45 14.971,-2.91 14.971,-2.077 15.989,-1.059 26.116,-1.059 26.929,-0.246 30.158,-0.246 32.792,2.387 32.792,3.6 32.179,4.213 31.42,4.213 30.95,4.684 30.95,4.797 U2.44@30.34,5.407
DAC_1: R1.1 U2.12 | length 4.5
  Top Layer w0.2: U2.12@27.865,11.706 27.865,11.781 28.22,12.136 28.22,12.22 28.805,12.805 29.397,12.805 29.575,12.627 v1(30.117,12.627)
  Bottom Layer w0.2: v1(30.117,12.627) 30.166,12.579 30.166,11.682 R1.1@30.666,11.182
DCBUS: C17.1 C18.1 C19.1 C21.2 C22.1 C23.1 C33.2 C34.2 C35.2 C36.2 D2.1 P5.2 P6.2 Q1.5 Q3.5 Q5.5 R33.2 U5.4 U5.5 | length 6.7
  Top Layer w0.3: P6.2@35.825,17.551 36.494,16.881 36.494,15.749 36.618,15.625 R33.2@36.618,11.134
  other v1: 34.222,26.215 34.877,26.215 35.493,26.215 36.123,26.215 34.222,26.895 34.877,26.895 35.493,26.895 36.123,26.895 34.222,27.47 34.877,27.47 35.493,27.47 36.123,27.47 34.222,28.062 34.877,28.062 35.493,28.062 36.123,28.062 16.832,31.364 17.487,31.364 18.103,31.364 18.732,31.364 10.806,31.402 11.461,31.402 12.077,31.402 12.707,31.402 16.832,32.043 17.487,32.043 18.103,32.043 18.732,32.043 10.806,32.081 11.461,32.081 12.077,32.081 12.707,32.081 16.832,32.618 17.487,32.618 18.103,32.618 18.732,32.618 10.806,32.656 11.461,32.656 12.077,32.656 12.707,32.656 16.832,33.211 17.487,33.211 18.103,33.211 18.732,33.211 10.806,33.249 11.461,33.249 12.077,33.249 12.707,33.249
DRV8323_CS_1: U2.17 U5.29 | length 6.1
  Top Layer w0.25: v1(24.195,12.531) 24.235,12.57 24.652,12.57 ; 24.653,12.571 25.112,12.571 25.551,13.009 25.551,14.049 25.896,14.394 U5.29@25.896,14.416 ; v1(25.049,10.715) 25.049,10.706 25.455,10.301 U2.17@25.455,10.292
  Bottom Layer w0.25: v1(24.195,12.531) 24.195,12.475 23.95,12.229 23.95,11.802 24.332,11.42 24.397,11.42 25.049,10.767 v1(25.049,10.715)
DRV8323_MISO_1: R30.1 U2.40 U5.26 | length 15.9
  Top Layer w0.25: v1(23.856,13.606) 23.858,13.608 23.858,14.291 23.823,14.325 24.578,15.081 24.578,15.219 U5.26@24.836,15.476 ; U2.40@28.926,3.993 28.94,3.993 29.457,3.475 v1(29.472,3.475)
  Bottom Layer w0.25: v1(23.856,13.606) 23.856,13.591 29.832,7.615 29.832,4.145 29.511,3.824 29.511,3.553 v1@29.416,3.458
DRV8323_MOSI_1: U2.2 U5.27 | length 11.9
  Top Layer w0.25: v1(24.455,13.705) 24.455,14.389 U5.27@24.995,14.928 ; U2.2@31.401,8.171 31.411,8.171 31.96,8.721 v1(31.97,8.721)
  Bottom Layer w0.25: v1(24.455,13.705) 24.494,13.744 25.184,13.744 30.027,8.9 30.988,8.9 31.167,8.721 v1(31.97,8.721)
DRV8323_SCLK_1: U2.39 U5.28 | length 15.7
  Top Layer w0.25: v1(24.989,13.187) 24.959,13.218 24.959,14.185 U5.28@25.348,14.575 ; U2.39@28.572,3.639 29.291,2.92 29.563,2.92 v1(29.602,2.88)
  Bottom Layer w0.25: v1(24.989,13.187) 30.232,7.944 30.232,3.979 29.986,3.733 29.986,3.196 29.974,3.196 29.658,2.88 v1(29.602,2.88)
FCUR1_1: C31.2 R40.1 U2.11 | length 14
  Top Layer w0.3: v1(19.394,11.466) 19.408,11.451 20.059,11.451 20.081,11.473 R40.1@20.081,12.291 ; U2.11@28.219,11.353 28.219,11.356 28.669,11.806 28.669,11.991 v1(28.681,12.004)
  S1 w0.3: v1(19.394,11.466) 22.503,14.574 25.042,14.574 26.999,12.617 28.089,12.617 28.681,12.025 v1(28.681,12.004)
FCUR2_1: C30.2 R35.1 U2.14 | length 13.4
  Top Layer w0.3: v1(20.693,11.982) 20.7,11.974 21.045,11.974 21.1,11.919 21.22,11.8 C30.2@21.22,11.455 ; 21.22,11.919 R35.1@21.22,12.253 ; v1(24.924,11.672) 24.947,11.694 26.17,11.694 26.512,11.353 U2.14@26.515,11.353
  S1 w0.3: v1(20.693,11.982) 20.693,9.696 21.54,8.849 24.264,8.849 25.907,10.492 25.907,11.08 25.315,11.672 v1(24.924,11.672)
FCUR3_1: C28.2 R32.1 U2.18 | length 5
  Top Layer w0.25: R32.1@22.136,12.214 R32.1@22.148,12.202 ; C28.2@22.16,11.445 22.148,11.457 R32.1@22.148,12.202 ; v1(23.422,12.145) 23.388,12.18 22.17,12.18 R32.1@22.148,12.202 ; v1(24.292,10.714) 24.309,10.714 25.085,9.939 U2.18@25.101,9.939
  S1 w0.25: v1(23.422,12.145) 23.44,12.145 24.267,11.318 24.267,10.74 v1(24.292,10.714)
GH_A_1: Q1.4 U5.6 | length 12.5
  Top Layer w0.3: U5.6@28.725,20.073 30.965,22.313 30.965,27.922 32.056,29.013 32.056,29.275 33.252,30.471 Q1.4@33.252,30.671
GH_B_1: Q3.4 U5.15 | length 22.1
  Top Layer w0.3: Q3.4@15.91,35.777 15.775,35.642 15.336,35.642 14.638,34.944 14.638,27.874 19.39,23.122 20.538,23.122 20.542,23.118 21.79,23.118 U5.15@24.836,20.073
GH_C_1: Q5.4 U5.16 | length 27.6
  Top Layer w0.3: Q5.4@9.89,35.723 9.89,35.523 9.29,34.923 9.29,29.249 9.793,28.746 9.793,25.702 10.085,25.41 15.825,25.41 18.563,22.672 20.352,22.672 20.356,22.668 21.534,22.668 U5.16@24.482,19.719
GL_A_1: D6.1 Q2.4 U5.8 | length 11.2
  Top Layer w0.3: U5.8@28.018,20.78 30.065,22.827 30.065,23.622 ; D6.1@29.255,23.586 30.03,23.586 30.065,23.622 ; Q2.4@30.711,30.073 30.711,28.94 30.065,28.295 30.065,23.622
GL_B_1: D7.1 Q4.4 U5.13 | length 18.6
  Top Layer w0.3: D7.1@20.847,24.227 21.432,24.812 21.432,24.89 ; Q4.4@25.149,30.073 25.149,30.273 24.412,31.01 21.051,31.01 20.32,30.279 20.32,29.303 19.878,28.861 19.878,26.444 21.432,24.89 ; U5.13@25.543,20.78 21.432,24.89
GL_C_1: D8.1 Q6.4 U5.18 | length 23.3
  Top Layer w0.3: Q6.4@8.111,29.966 8.111,28.975 8.893,28.193 8.893,25.329 9.712,24.51 15.452,24.51 16.987,22.975 ; D8.1@16.421,22.342 16.407,22.355 16.407,22.395 16.987,22.975 ; U5.18@23.775,19.012 21.019,21.768 19.983,21.768 19.979,21.772 18.19,21.772 16.987,22.975